# EAGLE board saturn_frontend_rv5 (EAGLE 7.7.0)
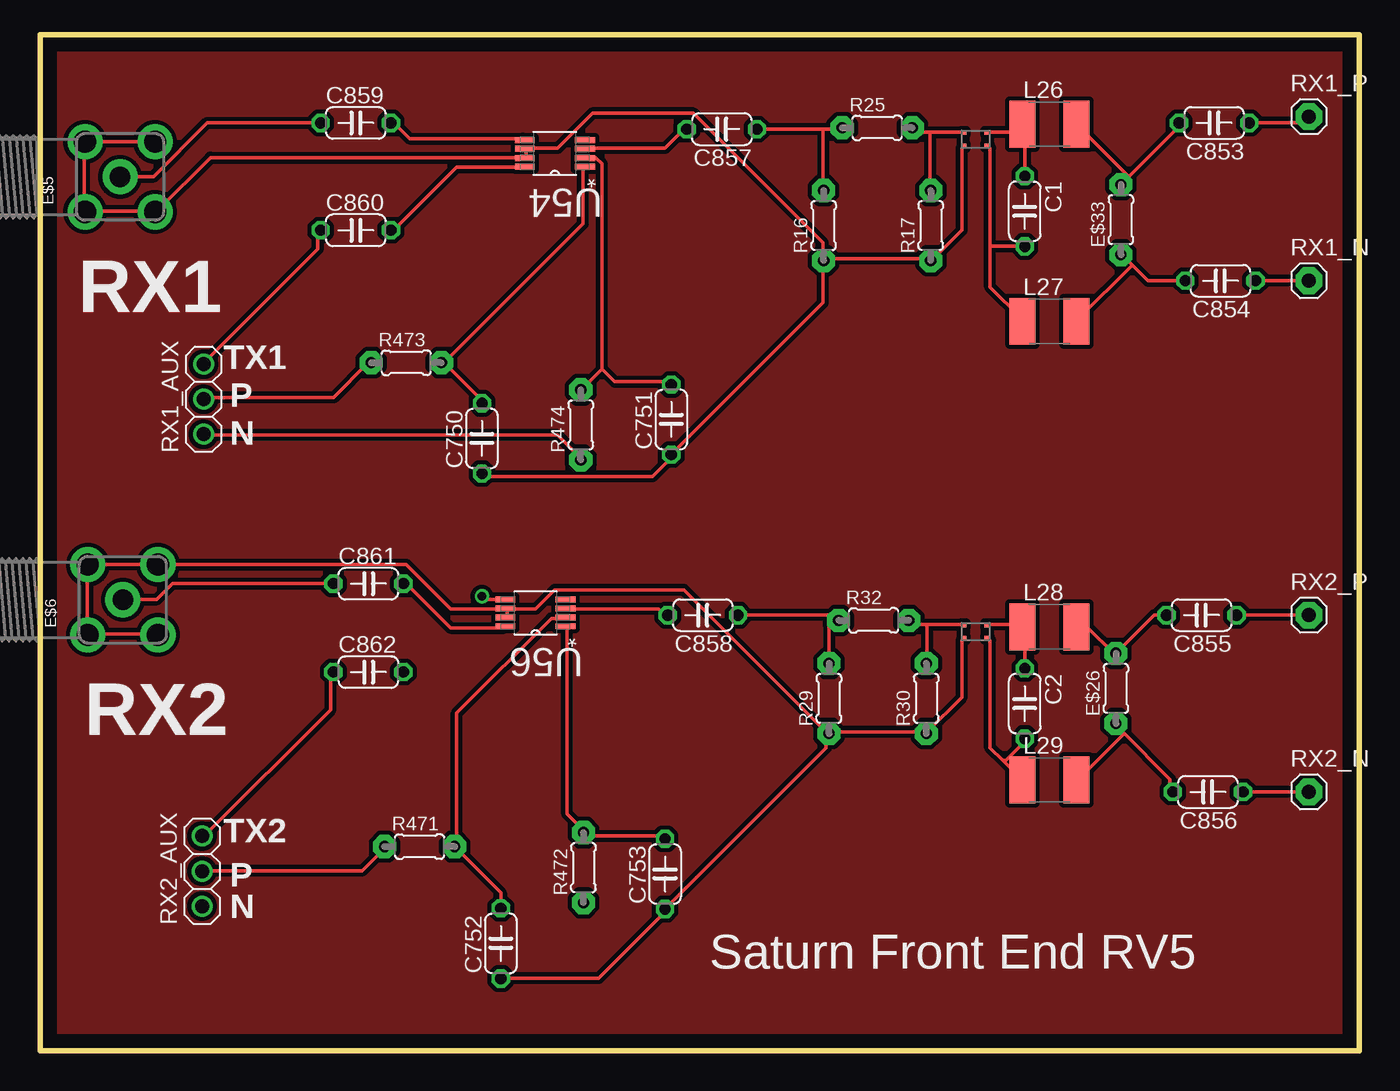
[diagram p0: board, top side]
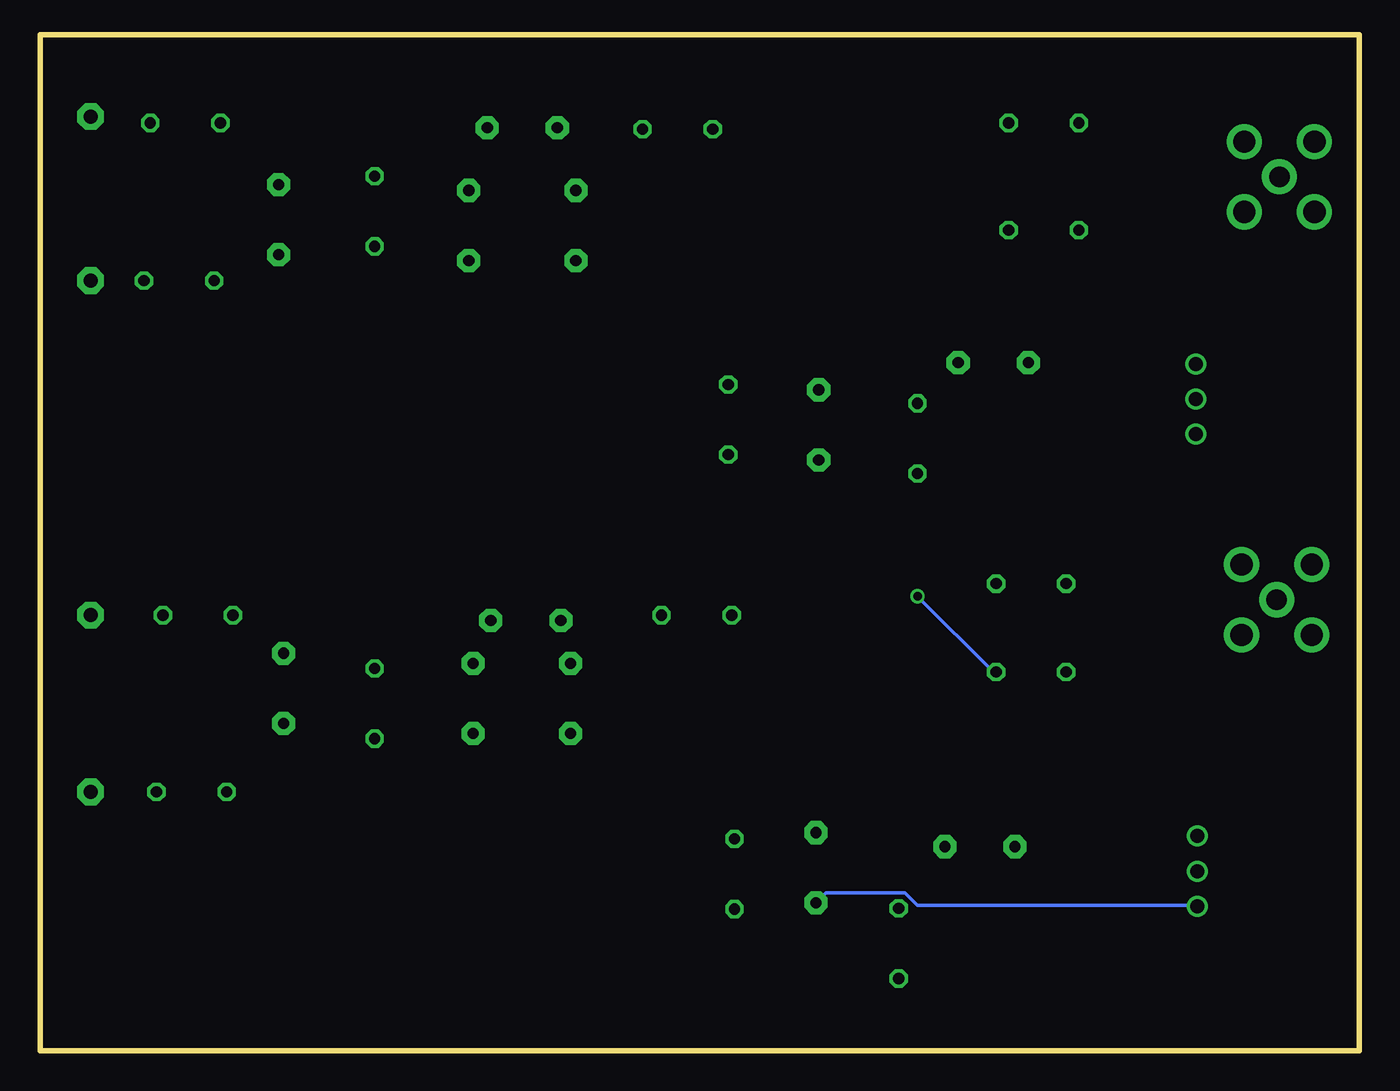
[diagram p1: board, bottom side, seen from below]

Size 95.55 x 73.61 mm. Coordinates in mm from the lower left corner, seen from the top.
Outline: 0,73.61 95.55,73.61 95.55,0 0,0 0,73.61
Copper layers (1*16): Top 0.035mm / dielectric 1.5mm / Bottom 0.035mm
Design rules "default": minimum track width 10mil, minimum drill 24mil, track to track 8mil, track to pad 8mil, pad to pad 8mil, via to via 8mil, smd to smd 8mil, copper to edge 40mil, drill to drill 8mil, minimum pad ring 10mil, minimum via ring 8mil, stop-mask expansion 4mil, vias tented up to drill 0mil, thermal gap 10mil

## Footprints (pad centres in the part's own frame; a part is rotated, then mirrored left to right if it is on the bottom)
C050-024X044 = drill 0.813 octagon: 1 -2.54,0; 2 2.54,0
BALUN_LOGICALS = smd 0.4 x 0.35: 1 0.13,1.13; 2 0.13,0.14; 3 1.86,0.16; 4 1.86,1.13
SMA90_DIP = drill 1.5 pad 2.54: ANTENNA 0,0 | drill 1.6 pad 2.54: GND1 -2.54,2.54; GND2 2.54,2.54; GND3 -2.54,-2.54; GND4 2.54,-2.54
0204/5 = drill 0.813 pad 1.676 octagon: 1 -2.54,0; 2 2.54,0
L1812 = smd 1.9 x 3.4: 1 -1.95,0; 2 1.95,0
1X03 = drill 1.016: 1 -2.54,0; 2 0,0; 3 2.54,0
1X01 = drill 1.016 pad 1.93 octagon: 1 0,0
SOP65P490X110-8N = smd 1.422 x 0.432: 1 -2.184,0.965; 2 -2.184,0.33; 3 -2.184,-0.33; 4 -2.184,-0.965; 5 2.184,-0.965; 6 2.184,-0.33; 7 2.184,0.33; 8 2.184,0.965

## Placement (x,y rotation side)
C1  400 fF  [C050-024X044]  71.32,60.81 270 top
C2  400 fF  [C050-024X044]  71.32,25.15 270 top
C750  100 pF  [C050-024X044]  32,44.35 90 top
C751  100 pF  [C050-024X044]  45.72,45.72 90 top
C752  100 pF  [C050-024X044]  33.38,7.77 90 top
C753  100 pF  [C050-024X044]  45.26,12.8 90 top
C853  100 pF  [C050-024X044]  85.04,67.21 180 top
C854  100 pF  [C050-024X044]  85.5,55.78 180 top
C855  100 pF  [C050-024X044]  84.12,31.55 180 top
C856  100 pF  [C050-024X044]  84.58,18.75 180 top
C857  100 pF  [C050-024X044]  49.38,66.75 180 top
C858  100 pF  [C050-024X044]  48.01,31.55 180 top
C859  100 pF  [C050-024X044]  22.86,67.21 0 top
C860  100 pF  [C050-024X044]  22.86,59.44 0 top
C861  100 pF  [C050-024X044]  23.77,33.83 0 top
C862  [C050-024X044]  23.77,27.43 0 top
E$1  [BALUN_LOGICALS]  66.75,65.38 0 top
E$2  [BALUN_LOGICALS]  66.75,29.72 0 top
E$5  [SMA90_DIP]  5.79,63.3 90 top
E$6  [SMA90_DIP]  5.99,32.66 90 top
E$26  93.7 Ohm  [0204/5]  77.92,26.24 90 top
E$33  93.7 Ohm  [0204/5]  78.28,60.2 90 top
L26  1.0 nH  [L1812]  73.1,67.11 0 top
L27  1.0 nH  [L1812]  73.1,52.83 0 top
L28  1.0 nH  [L1812]  73.1,30.71 0 top
L29  1.0 nH  [L1812]  73.1,19.61 0 top
R16  221 Ohm  [0204/5]  56.75,59.77 90 top
R17  221 Ohm  [0204/5]  64.51,59.77 90 top
R25  23.7 Ohm  [0204/5]  60.63,66.85 0 top
R29  221 Ohm  [0204/5]  57.14,25.51 90 top
R30  221 Ohm  [0204/5]  64.19,25.51 90 top
R32  23.7 Ohm  [0204/5]  60.38,31.17 0 top
R471  100 Ohm  [0204/5]  27.48,14.78 0 top
R472  100 Ohm  [0204/5]  39.36,13.26 90 top
R473  100 Ohm  [0204/5]  26.52,49.83 0 top
R474  100 Ohm  [0204/5]  39.16,45.33 90 top
RX1_AUX  [1X03]  11.84,47.19 90 top
RX1_N  [1X01]  91.9,55.78 0 top
RX1_P  [1X01]  91.9,67.67 0 top
RX2_AUX  [1X03]  11.73,13 90 top
RX2_N  [1X01]  91.9,18.75 0 top
RX2_P  [1X01]  91.9,31.55 0 top
U54  [SOP65P490X110-8N]  37.28,64.99 180 top
U56  [SOP65P490X110-8N]  35.88,31.71 180 top

## Library data of the parts
C1 C2 C750-C753 C853-C862 E$5 E$6 E$26 E$33 R16 R17 R25 R29 R30 R32 R471-R474 RX1_AUX RX1_N RX1_P RX2_AUX RX2_N RX2_P = adafruit
E$1 E$2 = cody_custom_library
L26-L29 = eagle-ltspice
U54 U56 = SOP65P490X110-8N

## Nets
S$1: E$2.1 R30.2 R32.2
S$2: C2.1 E$2.4 L28.1
S$3: C858.1 R29.2 R32.1
S$5: C855.2 E$26.2 L28.2
S$6: C855.1 RX2_P.1
S$7: C856.2 E$26.1 L29.2
S$8: C2.2 E$2.3 L29.1
S$10: C857.1 R16.2 R25.1
S$12: E$1.1 R17.2 R25.2
S$14: C1.1 E$1.4 L26.1
S$16: C1.2 E$1.3 L27.1
S$18: C853.2 E$33.2 L26.2
S$19: C854.2 E$33.1 L27.2
S$23: C853.1 RX1_P.1
S$24: C854.1 RX1_N.1
S$25: R473.1 RX1_AUX.2
S$27: C750.2 R473.2 U54.1
S$28: C751.2 R474.2 U54.2
S$29: R474.1 RX1_AUX.1
S$32: R471.1 RX2_AUX.2
S$33: C752.2 R471.2 U56.2
S$34: C753.2 R472.2 U56.1
S$35: C861.1 E$6.ANTENNA
S$36: C862.1 RX2_AUX.3
S$37: C860.1 RX1_AUX.3
S$38: C859.1 E$5.ANTENNA
S$39: C859.2 U54.5
S$40: C860.2 U54.8
S$41: C862.2 U56.5
S$42: C861.2 U56.8
S$43: C858.2 U56.3
S$44: C857.2 U54.3
S$45: C750.1 C751.1 E$1.2 E$5.GND1 E$5.GND2 E$5.GND3 E$5.GND4 R16.1 R17.1 U54.6 U54.7
S$46: C752.1 C753.1 E$2.2 E$6.GND1 E$6.GND2 E$6.GND3 E$6.GND4 R29.1 R30.1 U56.6 U56.7
S$47: C856.1 RX2_N.1
S$49: R472.1 RX2_AUX.1

## Tracks (layer width: path | path; a pad name or v marks a point on that pad's centre or on a via)
GND
  pour Top (isolate 0.305): 0.46,73.61 95.55,73.61 95.55,0 0,0 0,73.61
S$1
  Top 0.254: 64.24,30.86 63.32,30.86 63.09,31.09 R32.2 | 64.24,30.86 66.75,30.86 E$2.1 | 64.24,30.86 64.24,28.12 R30.2
S$2
  Top 0.254: E$2.4 68.81,30.86 71.09,30.86 L28.1 71.32,30.63 C2.1
S$3
  Top 0.254: 57.15,31.55 57.61,31.55 57.84,31.32 R32.1 57.15,31.55 | 57.15,31.55 C858.1 | 57.15,31.55 57.15,28.12 R29.2
S$5
  Top 0.254: C855.2 80.7,31.55 77.95,28.8 E$26.2 77.72,28.8 75.89,30.63 75.21,30.63 L28.2
S$6
  Top 0.254: RX2_P.1 C855.1
S$7
  Top 0.254: 78.41,23.09 77.95,23.55 E$26.1 78.41,23.09 | 78.41,23.09 81.84,19.66 81.84,18.74 C856.2 | 78.41,23.09 78.41,22.86 75.21,19.66 L29.2
S$8
  Top 0.254: 69.72,21.03 71.09,19.66 L29.1 | 69.72,21.03 68.81,21.95 68.81,29.72 E$2.3 | 69.72,21.03 69.95,21.03 71.32,22.4 C2.2
S$10
  Top 0.254: 56.69,66.75 58.06,66.75 R25.1 | 56.69,66.75 C857.1 | 56.69,66.75 56.69,62.41 R16.2
S$12
  Top 0.254: 64.46,66.52 63.55,66.52 63.32,66.75 R25.2 | 64.46,66.52 66.75,66.52 E$1.1 | 64.46,66.52 64.46,62.41 R17.2
S$14
  Top 0.254: E$1.4 68.81,66.52 70.64,66.52 71.09,66.98 L26.1 71.32,66.98 C1.1
S$16
  Top 0.254: 68.81,58.29 68.81,55.32 71.09,53.03 L27.1 | 68.81,58.29 68.81,65.38 E$1.3 | 68.81,58.29 71.32,58.29 C1.2
S$18
  Top 0.254: 78.87,63.32 E$33.2 78.41,62.86 | 78.87,63.32 82.3,66.75 82.3,67.21 C853.2 | 78.87,63.32 75.21,66.98 L26.2
S$19
  Top 0.254: C854.2 80.24,55.78 79.1,56.92 | 79.1,56.92 78.41,57.61 E$33.1 | 79.1,56.92 75.21,53.03 L27.2
S$23
  Top 0.254: C853.1 91.44,67.21 RX1_P.1
S$24
  Top 0.254: RX1_N.1 C854.1
S$25
  Top 0.254: RX1_AUX.2 11.89,47.32 21.26,47.32 23.77,49.83 R473.1
S$27
  Top 0.254: 29.26,49.83 39.32,59.89 39.32,64.01 U54.1 | 29.26,49.83 32,47.09 C750.2 | 29.26,49.83 R473.2
S$28
  Top 0.254: 40.69,49.38 40.69,64.24 40.23,64.69 39.55,64.69 U54.2 | 40.69,49.38 39.32,48.01 R474.2 | 40.69,49.38 41.6,48.46 45.72,48.46 C751.2
S$29
  Top 0.254: RX1_AUX.1 11.89,44.58 37.49,44.58 39.09,42.98 R474.1
S$32
  Top 0.254: RX2_AUX.2 11.89,13.03 23.32,13.03 24.92,14.63 R471.1
S$33
  Top 0.254: U56.2 37.95,31.32 37.03,31.32 30.17,24.46 30.17,14.86 R471.2 33.38,11.43 C752.2
S$34
  Top 0.254: U56.1 38.18,30.63 38.18,17.14 39.32,16 R472.2 39.55,15.77 39.78,15.54 45.26,15.54 C753.2
S$35
  Top 0.254: C861.1 9.6,33.83 8.46,32.69 6.17,32.69 E$6.ANTENNA
S$36
  Top 0.254: C862.1 21.03,27.43 21.03,24.69 11.89,15.54 RX2_AUX.3
S$37
  Top 0.254: C860.1 20.12,59.44 20.12,58.06 11.89,49.83 RX1_AUX.3
S$38
  Top 0.254: C859.1 12.12,67.21 8.23,63.32 5.94,63.32 E$5.ANTENNA
S$39
  Top 0.254: U54.5 34.98,66.07 26.75,66.07 25.6,67.21 C859.2
S$40
  Top 0.254: U54.8 34.98,64.01 30.17,64.01 25.6,59.44 C860.2
S$41  (via drill 0.61)
  Top 0.254: v32,32.92 32.23,32.69 33.6,32.69 U56.5
  Bottom 0.254: v32,32.92 26.52,27.43 C862.2
S$42
  Top 0.254: U56.8 33.6,30.63 29.72,30.63 26.52,33.83 C861.2
S$43
  Top 0.254: U56.3 38.18,32 44.81,32 45.26,31.55 C858.2
S$44
  Top 0.254: U54.3 39.55,65.38 45.26,65.38 46.63,66.75 C857.2
S$45
  Top 0.254: E$5.GND4 E$5.GND2 3.2,65.84 3.2,60.81 E$5.GND1 3.43,60.81 8.23,60.81 E$5.GND3 8.46,60.81 12.34,64.69 34.98,64.69 U54.7 35.2,64.69 35.2,65.15 U54.6 35.2,65.38 37.49,65.38 40,67.89 47.32,67.89 56.69,58.52 56.69,57.38 R16.1 | R16.1 56.92,57.38 64.46,57.38 R17.1 64.69,57.38 66.75,59.44 66.75,65.38 E$1.2 | C750.1 32,41.6 44.35,41.6 45.72,42.98 C751.1 45.72,43.21 56.69,54.18 56.69,57.15 R16.1
S$46
  Top 0.254: E$6.GND3 8.46,30.17 3.66,30.17 E$6.GND1 3.43,30.17 3.43,35.2 E$6.GND2 E$6.GND4 26.52,35.2 29.72,32 33.6,32 U56.6 33.83,32 | 33.83,32 33.83,31.55 U56.7 | R29.1 57.15,23.09 64.01,23.09 R30.1 64.24,23.09 66.75,25.6 66.75,29.72 E$2.2 | C752.1 33.38,5.26 40.46,5.26 45.26,10.06 C753.1 45.26,10.29 56.92,21.95 56.92,22.86 R29.1 | 33.83,32 35.89,32 37.26,33.38 46.63,33.38 56.92,23.09 R29.1
S$47
  Top 0.254: RX2_N.1 C856.1
S$48
  Top 0.406: 95.55,0 0,0
S$49
  Bottom 0.254: RX2_AUX.1 11.89,10.52 32,10.52 32.92,11.43 38.63,11.43 39.32,10.74 R472.1

## Text on the board
tPlace: RX1 | TX1 | P | N | RX2 | TX2 | P | N | Saturn Front End RV5